# Altium PCB Board2.PcbDoc
Units mm, origin at the board's own origin, x right, y up, seen from the top; angles counter-clockwise.
Board outline 45 x 60 mm, 2 copper layers (Top Layer, Bottom Layer); 20 components, 21 nets, 61 pads, 10 vias.
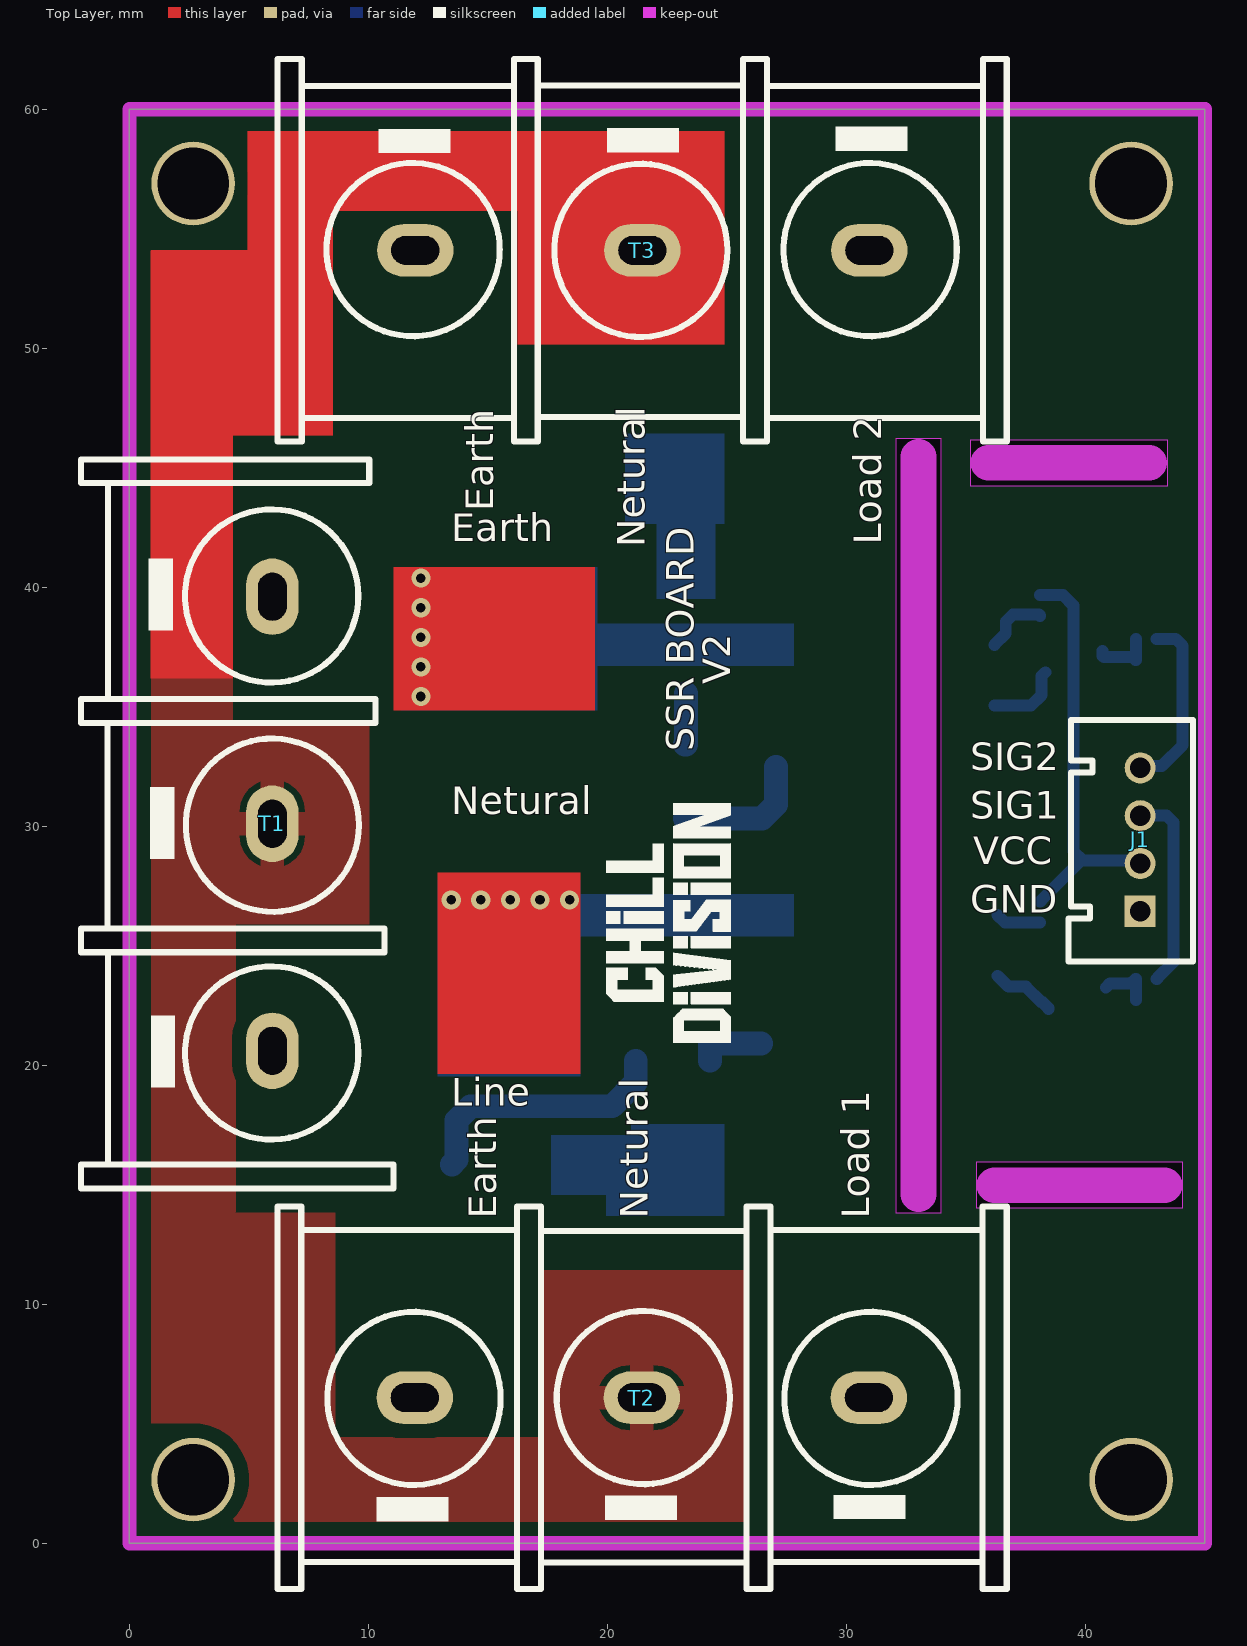
[diagram p0: Top Layer view]
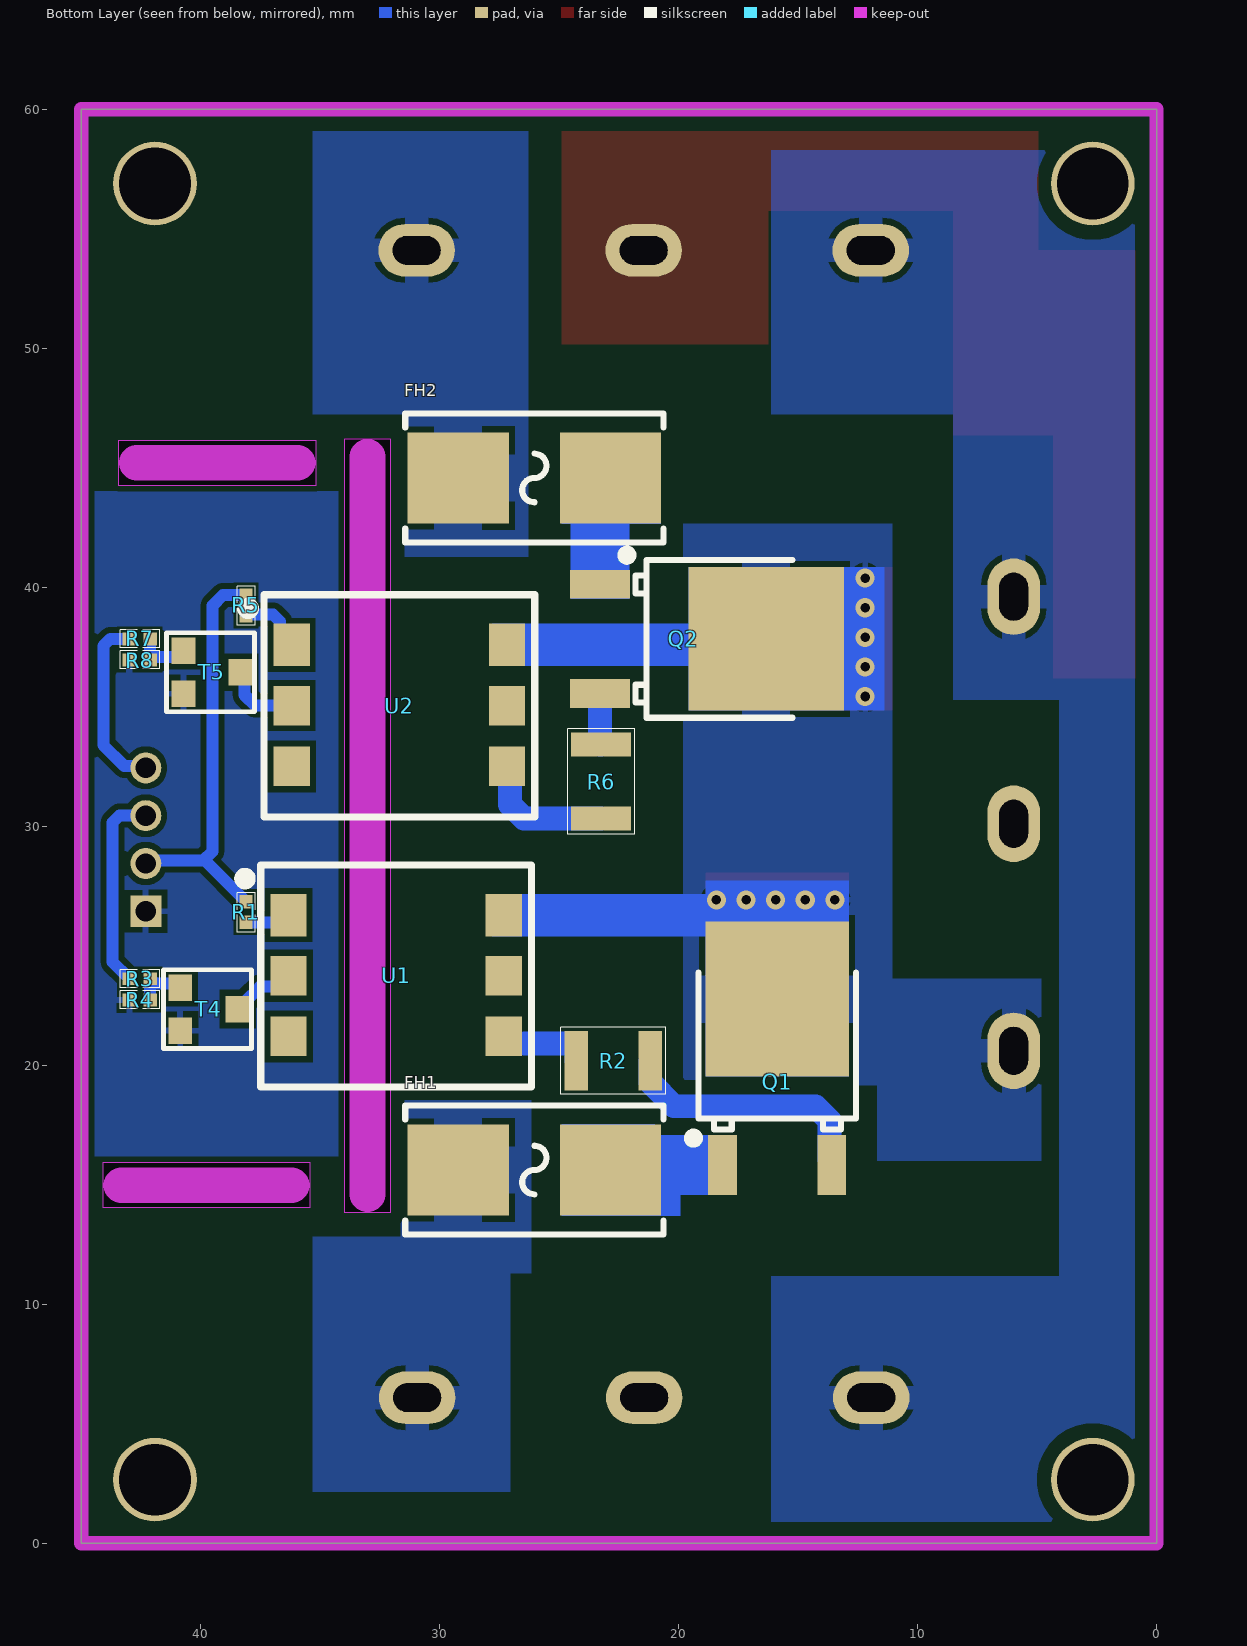
[diagram p1: Bottom Layer view, seen from below]
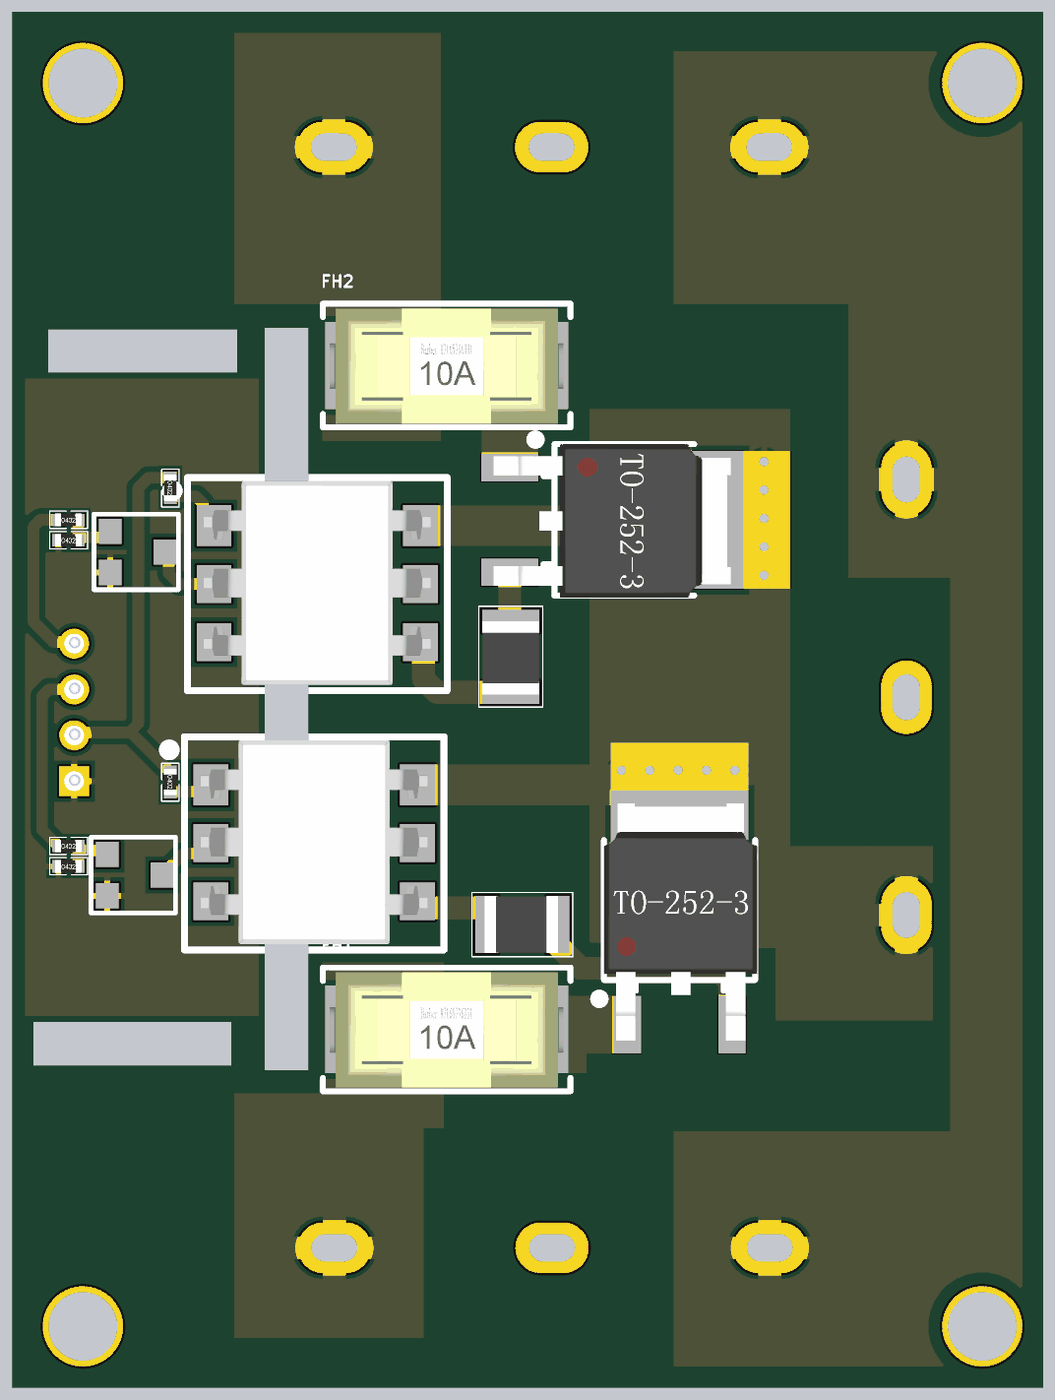
[diagram p2: 3D render of the assembled board from below, using the file's embedded part models]

## Layer stack, top to bottom
Top Solder: solder mask 0.0102, Solder Resist, Dk 3.5
Top Layer: signal copper 0.0356
Dielectric 1: dielectric 0.32, FR-4, Dk 4.8
Bottom Layer: signal copper 0.0356
Bottom Solder: solder mask 0.0102, Solder Resist, Dk 3.5

## Board outline
0,0 0,60 45,60 45,0
cut-out: 35.433,15.938 35.433,14.034 44.069,14.034 44.069,15.938
cut-out: 33.972,46.228 32.067,46.228 32.067,13.843 33.972,13.843
cut-out: 35.179,46.164 35.179,44.259 43.434,44.259 43.434,46.164

## Design rules (kind name [scope] priority, off if disabled: settings)
Clearance Clearance_1 [InNamedPolygon('NETURAL_L01_P004') Or InNamedPolygon('EARTH_L02_P001') Or InNamedPolygon('LINE_L02_P000') Or InNamedPolygon('LOAD_1_L02_P003') Or InNamedPolygon('LOAD_2_L02_P002')] p1: gap=0.6 ignorepadtopadclearanceinfootprint=FALSE
Clearance [All] p2: gap=0.254 ignorepadtopadclearanceinfootprint=FALSE except(0: Arc-Hole Track-Hole SMDPad-Hole THPad-Hole Via-Hole Fill-Hole Poly-Hole Region-Hole Text-Hole)
PolygonConnect PolygonConnect_1 [All vs IsNamedPolygon('NETURAL_L01_P004') Or IsNamedPolygon('EARTH_L02_P001') Or IsNamedPolygon('LINE_L02_P000') Or IsNamedPolygon('LOAD_1_L02_P003') Or IsNamedPolygon('LOAD_2_L02_P002')] p1: thpad.connectstyle=Relief thpad.reliefconductorwidth=1 thpad.reliefentries=4 thpad.polygonreliefangle="90 Angle" thpad.airgapwidth=0.254 smdpad.connectstyle=Relief smdpad.reliefconductorwidth=2 smdpad.reliefentries=4 smdpad.polygonreliefangle="90 Angle" smdpad.airgapwidth=0.254 via.connectstyle=Relief via.reliefconductorwidth=0.254 via.reliefentries=4 via.polygonreliefangle="90 Angle" via.airgapwidth=0.254
PolygonConnect [All] p2: connectstyle=Relief reliefconductorwidth=0.254 reliefentries=4 polygonreliefangle="90 Angle" airgapwidth=0.254
RoutingVias [All] p1: holewidth=0.711 width=1.27 viastyle="Through Hole" minholewidth=0.711 minwidth=1.27 maxholewidth=0.711 maxwidth=1.27
SolderMaskExpansion [All] p1: expansion=0.102 istentingtop=FALSE
Width [All] p1: maxlimit=2 minlimit=0.4 preferedwidth=1
30 further rules are at their usual default settings.

## Components (designator, comment, footprint, x,y, rotation, side; value= is the part's Value field where it differs from the comment)
FH1 "XF-154" FUSE-SMD_L10.5-W5.1 26.035,15.621 r180 bottom
FH2 "XF-154" FUSE-SMD_L10.5-W5.1 26.035,44.577 r180 bottom
J1 "Header 4P*2mm" CONN-TH_4P-P2.00_HX20020-4A_2 42.291,26.448 r270 top
Q1 "BT136S-800E,118" TO-252-3_L6.6-W6.1-P4.57-LS9.9-BR-CW 15.875,19.304 r270 bottom
Q2 "BT136S-800E,118" TO-252-3_L6.6-W6.1-P4.57-LS9.9-BR-CW 19.812,37.846 r0 bottom
R1 "330R" R0402 38.1,26.416 r270 bottom
R2 "330R / 0.5W" R1210 22.733,20.193 r0 bottom
R3 "4.7kR" R0402 42.545,23.622 r180 bottom
R4 "10kR" R0402 42.545,22.733 r180 bottom
R5 "330R" R0402 38.1,39.243 r270 bottom
R6 "330R / 0.5W" R1210 23.241,31.877 r270 bottom
R7 "4.7kR" R0402 42.545,37.846 r180 bottom
R8 "10kR" R0402 42.545,36.957 r180 bottom
T1 "WJ45C-B-9.5-3P" CONN-TH_3P-P9.50_WJ45C-B-3P 5.978,39.609 r270 top
T2 "WJ45C-B-9.5-3P" CONN-TH_3P-P9.50_WJ45C-B-3P 11.938,6.096 r0 top
T3 "WJ45C-B-9.5-3P" CONN-TH_3P-P9.50_WJ45C-B-3P 30.958,54.102 r180 top
T4 "MMBT3904 Transistor" MMBT3904 39.649,22.352 r180 bottom
T5 "MMBT3904 Transistor" MMBT3904 39.522,36.449 r180 bottom
U1 "MOC3051SM" OPTOTRIAC_SMD_6PIN 31.817,23.749 r270 bottom
U2 "MOC3051SM" OPTOTRIAC_SMD_6PIN 31.683,35.052 r270 bottom

## Footprints (in the part's own frame and the unit in brackets; to place one, negate y for a bottom-side part, rotate by r counter-clockwise, add the part's x,y. Pads: shape width x height; smd on the part's side, far side on the other; paste and mask are expansions set on the pad)
CONN-TH_3P-P9.50_WJ45C-B-3P [mm]
  oval 3.2x2.2 hole 1.2 slot 2 at 0 deg: 1(0,0) 2(9.5,0) 3(18.999,0)
  silkscreen extent -5.75,-8 24.77,5.07
CONN-TH_4P-P2.00_HX20020-4A_2 [mm]
  rect 1.3x1.3 hole 0.85: 1(0,0)
  round 1.3 hole 0.85: 2(-2,0) 3(-4,0) 4(-6,0)
  silkscreen extent -8,-3 2.1,2.2, body extent -8.05,-3.08 1.95,2.02, height 8
FUSE-SMD_L10.5-W5.1 [mm]
  rect 4.24x3.81 smd paste+0 mask+0: 1(-3.185,0) 2(3.185,0)
  silkscreen extent -5.4,-2.7 5.4,2.7, body extent -5.11,-2.54 5.1,2.49, height 7.46
MMBT3904 [mm] "SOT23, 3-Leads, Body 2.90x2.45mm, Pitch 0.90mm, IPC Medium Density"
  rect 1x1.1 smd: B(-1.2,0.9) C(1.2,0) E(-1.2,-0.9)
  silkscreen extent -1.91,-1.65 1.78,1.65, body extent -0.7,-1.5 0.7,1.5, height 1.1
OPTOTRIAC_SMD_6PIN [mm]
  rect 1.78x1.52 smd mask+0.102: 1(-2.54,-4.505) 6(-2.54,4.505)
  rect 1.65x1.52 smd mask+0.102: 2(0,-4.505) 3(2.54,-4.505) 4(2.54,4.505) 5(0,4.505)
  silkscreen extent -4.64,-6.52 4.66,5.66, body extent -4.48,-4.95 4.41,4.95, height 5.93
R0402 [mm]
  rect 0.566x0.54 smd paste-100 mask+0.051: 1(-0.433,0) 2(0.433,0)
  silkscreen extent -0.81,-0.37 0.84,0.38, body extent -0.58,-0.28 0.58,0.28, height 0.41
R1210 [mm] "Chip Capacitor, 2-Leads, Body 4.35x3.15mm, IPC Medium Density"
  rect 1x2.5 smd mask+0.102: 1(-1.55,0) 2(1.55,0)
  silkscreen extent -2.2,-1.4 2.2,1.4, body extent -1.55,-1.25 1.65,1.25, height 1.5
TO-252-3_L6.6-W6.1-P4.57-LS9.9-BR-CW [mm]
  rect 2.5x1.2 smd paste+0 mask+0.05: 1(3.475,-2.286) 3(3.475,2.286)
  rect 6.5x6 smd paste+0 mask+0.05: 2(-3.475,0)
  silkscreen extent -4.57,-3.7 2.55,3.3, body extent -6.18,-3.3 4.17,3.4, height 2.41

## Part data
FH1 FH2: "C41371861", JLCPCB Part Class="Extended Part", Manufacturer=XFCN(兴飞), Add into BOM=yes, Convert to PCB=yes, Datasheet=https://atta.szlcsc.com/upload/public/pdf/source/20240828/54540296E604CB321541E8B6C3E496A3.pdf, Device=XF-154, LCSC Part Name=XF-154, Manufacturer Part=XF-154, Supplier=LCSC, Supplier Footprint=SMD, Supplier Part=C41371861, Symbol=XF-154
J1: library part ZX-HY2.0-4PZZ, "C541313", Colour=White, Current Rating (Max)=2A, Flame Retardant Rating=UL94V-0, JLCPCB Part Class="Extended Part", LCSC Part Name="1x4P 间距:2mm 直插 系列:HY 配套胶壳型号：ZX-HY2.0-4PJK 配套端子型号：ZX-HY2.0-DZ 配套杜邦线型号：ZX-HY2.0-4PBXC", Manufacturer=Megastar(兆星), Operating Temperature Range=-25℃~+85℃, Rated Voltage (Max)=250V, Add into BOM=yes, Contact Material=Brass, Contact Plating=Tin, Convert to PCB=yes, Datasheet=https://atta.szlcsc.com/upload/public/pdf/source/20241025/5A7CD93910E89EF197073334521200FC.pdf, Device=ZX-HY2.0-4PZZ, Manufacturer Part=ZX-HY2.0-4PZZ, Mounting Style="Direct Insert", Number of Pins=4P, Number of PINs Per Row=4, Number of Rows=1, Pins Structure=1x4P, Pitch=2mm, Plastic Material=-, Reference Series=HY, Row Spacing=-, Supplementary Features=-, Supplier=LCSC, Supplier Footprint=插件,P=2mm, Supplier Part=C7429580, Symbol=ZX-HY2.0-4PZZ, X-Length of Bottom Edge on Board (Spacing Line)=10mm, Y-Width of Bottom Edge on Board=5.1mm, Z-Height of the Board=8mm
Q1 Q2: "C581422", Gate Trigger   Voltage (Vgt)=1.5V, Gate Trigger Current(Igt)=10mA, Holding Current (Ih)=15mA, JLCPCB Part Class="Extended Part", Manufacturer=WeEn(瑞能), Operating Temperature=-, Peak Repetitive Off?State Voltage (Vdrm)=800V, RMS On-State Current(It (rms))=4A, Add into BOM=yes, Convert to PCB=yes, Datasheet=https://atta.szlcsc.com/upload/public/pdf/source/20200604/C581422_C791797B81F6B31C38BE664CA17CBB1A.pdf, Device=BT136S-800E,118, LCSC Part Name=BT136S-800E,118, Manufacturer Part=BT136S-800E,118, SCR Type=-, Supplier=LCSC, Supplier Footprint=DPAK, Supplier Part=C581422, Symbol=BT136S-800E,118
R1 R5: library part "0402 Resistor", "C159971"
R2 R6: library part AC1210FR-07330RL, "C2933817", Case Code (Imperial)=1210, Case Code (Metric)=3225, Manufacturer=Yageo, Max Operating Temperature=155°C, Max Power Dissipation=500mW, Min Operating Temperature=-55°C, Resistance=330R, Supplier Part Number 1=603-AC1210FR-07330RL, Temperature Coefficient=100ppm/°C, Tolerance=1%, Voltage Rating=200V, Case/Package=1210, Category="Chip SMD Resistors", ComponentLink1Description=http://www.mouser.com/ds/2/447/yageodocoutput-1111992.pdf?src-supplier=Mouser, ComponentLink1URL=http://www.mouser.com/ds/2/447/yageodocoutput-1111992.pdf?src-supplier=Mouser, ComponentLink2Description=http://www.yageo.com/NewPortal/yageodocoutput?fileName=/pdf/R-Chip/PYu-AC_51_RoHS_L_6.pdf&src-supplier=Digi-Key, ComponentLink2URL=http://www.yageo.com/NewPortal/yageodocoutput?fileName=/pdf/R-Chip/PYu-AC_51_RoHS_L_6.pdf&src-supplier=Digi-Key, Features="Moisture Resistant,Automotive AEC-Q200", Height=0.024inch, Length=0.122inch, Manufacturer Part Number=AC1210FR-07330RL, Number of Terminations=2, Packaging="Tape and Reel", Power Rating=500mW, Pricing 1="1=0.30000, 10=0.19100, 50=0.19100, 100=0.06200, 1000=0.04300, 10000=0.03100 (USD)", RoHS=Yes, RoHS Compliant=Yes, Series=AC, Stock 1=2010, Supplier 1=Mouser, Termination=SMD/SMT, Width=2.6mm
R3 R7: library part "0402 Resistor", "C105871"
R4 R8: library part "0402 Resistor", "C60490"
T1 T2 T3: "C8442", Color=Black, Current Rating (Max)=32A, JLCPCB Part Class="Extended Part", LCSC Part Name="9.5mm 1x3P 每排P数:3 排数:1 直针 中脚", Manufacturer=KANGNEX(康奈克斯电气), Operating Temperature Range=-40℃~+105℃, Voltage Rating (Max)=750V, Add into BOM=yes, Barrier Type=两面, Convert to PCB=yes, Datasheet=https://atta.szlcsc.com/upload/public/pdf/source/20191225/C8442_FBE59D2F29844B0ABF8A0A98E5C59968.pdf, Device=WJ45C-B-9.5-3P, Manufacturer Part=WJ45C-B-9.5-3P, Mounting Style=直针, Number of Pins=3P, Number of PINs Per Row=3, Number of Rows=1, Pin Location=中脚, Pitch=9.5mm, Structure=1x3P, Supplier=LCSC, Supplier Footprint=插件,P=9.5mm, Supplier Part=C8442, Symbol=WJ45C-B-3P, Wire Gauge - AWG=12~22, Wire Gauge - mm2=4
T4 T5: "C181119", Created By=NourAldin
U1 U2: "C22373368", Case/Package=SMD/SMT, Forward Current=60mA, Forward Voltage=1.18V, Hold Current=220uA, Isolation Voltage=7.5kV, Manufacturer="ON Semiconductor / Fairchild", Max Input Voltage=1.5V, Max Operating Temperature=85°C, Min Operating Temperature=-40°C, Nominal Input Voltage=1.15V, Package Quantity=1000, Power Dissipation=330mW, Reverse Breakdown Voltage=3V, Supplier Part Number 1=512-MOC3051SM, Approvals=UR, Category=Optocouplers, ComponentLink1Description=https://datasheet.ciiva.com/8097/moc3052m-8097782.pdf?src-supplier=Avnet, ComponentLink1URL=https://datasheet.ciiva.com/8097/moc3052m-8097782.pdf?src-supplier=Avnet, ComponentLink2Description=https://datasheet.ciiva.com/17022/moc3051m-17022507.pdf?src-supplier=Future+Electronics, ComponentLink2URL=https://datasheet.ciiva.com/17022/moc3051m-17022507.pdf?src-supplier=Future+Electronics, Isolation Voltage-Max=7.5kV, Lead Free="Lead Free", Manufacturer Part Number=MOC3051SM, Mount="Surface Mount", Number of Channels=1, Number of Circuits=1, Number of Elements=1, Number of Pins=6, Packaging=Bulk, Pricing 1="1=1.20000, 10=0.76100, 50=0.76100, 100=0.56400, 1000=0.40000, 10000=0.38200 (USD)", Radiation Hardening=No, RoHS=Yes, RoHS Compliant=Yes, Series=-, Stock 1=1665, Supplier 1=Mouser, Weight=0.81g

## Free pads (board coordinates)
  round 3.5 hole 3: ""(2.667,2.667) ""(2.667,56.896) ""(41.91,2.667) ""(41.91,56.896)

## Via types
v1: diameter 0.8, hole 0.4, Top Layer to Bottom Layer, 10 vias

## Nets (pads, with @x,y where several pads share a name; then routed paths per layer and width w, separated by ;. In a path a pad name is that pad's centre, name@x,y a point inside that pad or via, vN(x,y) a via of type N, cw(c..) or ccw(c..) an arc to the next point about the centre after c; other vN are vias at no path point)
Earth: T1.1 T2.1 T3.3
GND: J1.1 R4.1 R8.1 T4.E T5.E
Line: Q1.2 Q2.2 T1.3 U1.6 U2.6
  other v1: 13.462,26.924 14.7,26.924 15.938,26.924 17.177,26.924 18.415,26.924 12.192,35.433 12.192,36.671 12.192,37.91 12.192,39.148 12.192,40.386
"Load 1": FH1.1 T2.3
"Load 2": FH2.1 T3.1
NetFH1_2: FH1.2 Q1.1
NetFH2_2: FH2.2 Q2.1
NetQ1_3: Q1.3 R2.1 | length 11
  Bottom Layer w1: Q1.3@13.489,15.858 13.687,16.056 13.687,17.702 14.273,18.288 20.193,18.288 21.183,19.278 R2.1
NetQ2_3: Q2.3 R6.1 | length 2.2
  Bottom Layer w1: R6.1 23.287,33.427 Q2.3
NetR1_2: R1.2 U1.1 | length 1.9
  Bottom Layer w0.5: U1.1 36.628,25.983 R1.2
NetR2_2: R2.2 U1.4 | length 2.9
  Bottom Layer w1: R2.2 24.283,20.918 26.423,20.918
NetR3_2: R3.2 R4.2 T4.B | length 2.3
  Bottom Layer w0.5: T4.B 41.023,23.426 41.903,23.426 42.099,23.622 R3.2 R4.2
NetR5_2: R5.2 U2.1 | length 2.8
  Bottom Layer w0.5: U2.1 36.666,38.07 36.666,38.569 36.959,38.862 38.048,38.862 38.067,38.843 38.08,38.843 38.1,38.823 R5.2
NetR6_2: R6.2 U2.4 | length 5.6
  Bottom Layer w1: R6.2 26.465,30.327 27.051,30.913 U2.4@27.051,32.48
NetR7_2: R7.2 R8.2 T5.B | length 2.6
  Bottom Layer w0.5: T5.B 40.722,37.129 40.767,37.084 41.972,37.084 42.099,36.957 R8.2 R7.2
NetT4_C: T4.C U1.2 | length 2.7
  Bottom Layer w0.5: U1.2 36.78,23.291 37.51,23.291 38.149,22.652 38.199,22.652 38.449,22.402 T4.C
NetT5_C: T5.C U2.2 | length 3.2
  Bottom Layer w0.5: U2.2 37.719,35.052 38.164,35.497 38.164,36.29 T5.C
Netural: T1.2 T2.2 T3.2
Signal1: J1.3 R3.1 | length 8.4
  Bottom Layer w0.5: J1.3 43.395,30.448 43.688,30.155 43.688,24.332 43.011,23.655 43.011,23.642 42.991,23.622 R3.1
Signal2: J1.4 R7.1 | length 7.5
  Bottom Layer w0.5: J1.4 42.368,32.525 43.193,32.525 44.069,33.401 44.069,37.553 43.776,37.846 R7.1
VCC: J1.2 R1.1 R5.1 | length 17.4
  Bottom Layer w0.5: R1.1 38.1,26.862 38.12,26.882 38.133,26.882 39.826,28.575 39.878,28.575 ; R5.1 39.064,39.676 39.497,39.243 39.497,28.956 39.878,28.575 ; J1.2 42.164,28.575 39.878,28.575
pads on no net: U1.3 U1.5 U2.3 U2.5

## Polygon pours and split planes (outlines as drawn)
Line on Bottom Layer "LINE_L02_P000" (solid, pour order 0): 4.826,23.622 4.826,16.002 11.684,16.002 11.684,19.177 19.812,19.177 19.812,42.672 11.049,42.672 11.049,23.622
"Load 2" on Bottom Layer "LOAD_2_L02_P002" (solid, pour order 2): 35.306,59.182 35.306,47.244 31.496,47.244 31.496,41.275 26.289,41.275 26.289,59.182
"Load 1" on Bottom Layer "LOAD_1_L02_P003" (solid, pour order 3): 31.623,18.542 26.162,18.542 26.162,11.303 27.051,11.303 27.051,2.159 35.306,2.159 35.306,12.827 31.623,12.827
GND on Bottom Layer "GND_L02_P005" (solid, pour order 5): 34.036,44.013 44.831,44.013 44.831,16.2 34.036,16.2
Earth on Bottom Layer "EARTH_L02_P001" (solid, pour order 1): 16.129,58.293 16.129,47.244 8.509,47.244 8.509,35.306 4.064,35.306 4.064,11.176 16.129,11.176 16.129,0.508 0.635,0.508 0.635,58.293
Netural on Top Layer "NETURAL_L01_P004" (solid, pour order 6): 24.892,50.165 24.892,59.436 4.953,59.436 4.953,54.038 0.635,54.038 0.635,5.016 2.667,5.016 2.667,0.635 25.814,0.635 25.814,11.43 17.145,11.43 17.145,4.445 8.608,4.445 8.608,13.843 4.417,13.843 4.445,13.871 4.445,25.908 10.033,25.908 10.033,34.417 4.318,34.417 4.318,46.355 8.509,46.355 8.509,55.753 16.256,55.753 16.256,50.165

## Keep-outs
Keep-Out Layer:
  lines w0.6: 0,0 0,60 45,60 45,0 0,0
  lines w1.5: 33.02,14.605 33.02,45.466 ; 35.941,45.212 42.672,45.212 ; 36.195,14.986 43.307,14.986

## Other copper
Top Layer:
  region net Line: 19.482,34.85 19.482,40.843 11.049,40.843 11.049,34.85
  rectangle net Line: 12.879,19.634 18.872,28.067
  region net Netural: 4.318,36.195 4.318,46.355 8.509,46.355 8.509,55.753 16.256,55.753 16.256,50.165 24.892,50.165 24.892,59.092 4.953,59.092 4.953,54.102 0.908,54.102 0.889,54.083 0.889,36.195
Bottom Layer:
  rectangle net Line: 17.78,25.4 27.813,27.178
  rectangle net Line: 15.875,36.703 27.813,38.481
  rectangle net Line: 12.879,19.531 18.872,27.731
  region net Line: 19.585,34.85 19.585,40.843 11.385,40.843 11.385,34.85
  region net NetFH1_2: 17.653,17.075 17.653,14.579 19.939,14.579 19.939,13.716 24.892,13.716 24.892,17.526 20.996,17.526 20.996,17.075
  region net NetFH2_2: 20.752,46.422 24.892,46.422 24.892,42.672 24.511,42.672 24.511,39.531 22.055,39.531 22.055,42.672 20.752,42.672

## Silkscreen, mask and mechanical layers (free items; w line width, h text height)
Top Overlay:
  drawing of 17 lines, arcs and shapes, not listed
  text "Earth" at 15.611,43.18 h2 r90
  text "Load 2" at 31.854,41.783 h2 r90
  text "Netural" at 21.961,41.674 h2 r90
  text "Earth" at 13.462,41.539 h2
  text "V2" at 25.527,35.941 h2 r90
  text "SSR BOARD" at 24.003,33.147 h2 r90
  text "SIG2" at 35.179,31.948 h2
  text "Netural" at 13.462,30.109 h2
  text "SIG1" at 35.179,29.916 h2
  text "VCC" at 35.306,28.011 h2
  text "GND" at 35.179,25.979 h2
  text "Line" at 13.462,17.917 h2
  text "Earth" at 15.738,13.589 h2 r90
  text "Netural" at 22.088,13.589 h2 r90
  text "Load 1" at 31.359,13.589 h2 r90
Top Solder:
  rectangle: 12.827,19.48 18.915,28.113
  region: 19.636,34.798 19.636,40.886 11.003,40.886 11.003,34.798
Bottom Solder:
  rectangle: 12.879,19.931 18.872,28.131
  region: 19.185,34.85 19.185,40.843 10.985,40.843 10.985,34.85